# EAGLE board CombinedCircuit (EAGLE 9.7.0)

Size 450.85 x 189.67 mm. Coordinates in mm from the lower left corner, seen from the top.
Outline: 0,0 450.85,0 450.85,189.67 0,189.67 0,0
Copper layers (1*16): Top 0.035mm / dielectric 1.5mm / Bottom 0.035mm
Design rules "default": minimum track width 6mil, minimum drill 0.35mm, track to track 6mil, track to pad 6mil, pad to pad 6mil, via to via 6mil, smd to smd 6mil, copper to edge 40mil, drill to drill 6mil, minimum pad ring 10mil, minimum via ring 8mil, stop-mask expansion 4mil, vias tented up to drill 0mil, thermal gap 10mil

## Footprints (pad centres in the part's own frame; a part is rotated, then mirrored left to right if it is on the bottom)
BATTERY-GENERIC = drill 1.118 pad 3.15 octagon: + 2.54,0; - -2.54,0
LEDRD254W60D565H860B = drill 0.981 pad 1.581: 1 -1.27,0; 2 1.27,0
LEDRD254W60D565H860B_O = drill 0.981 pad 1.581: 1 -1.27,0; 2 1.27,0
LEDRD254W60D565H860B_G = drill 0.981 pad 1.581: 1 -1.27,0; 2 1.27,0
MQ-XX-SOCKET = drill 1.27: 1 -6.223,6.223; 2 -8.788,0; 3 -6.223,-6.223; 4 6.223,-6.223; 5 8.788,0; 6 6.223,6.223
DG01D = drill 1.118 pad 3.15 octagon: + 2.54,0; - -2.54,0
PIEZO = drill 1 pad 1.6: 1 -3.5,0; 2 3.5,0
28015 = drill 1.016 long: 1 -2.54,0; 2 0,0; 3 2.54,0
28027 = drill 1.016 long: 1 -2.54,0; 2 0,0; 3 2.54,0
RESAD1016W63L850D250B = drill 0.83 pad 1.43: 1 -5.08,0; 2 5.08,0
GL5528 = drill 0.8 pad 1.4: 1 -1.702,0; 2 1.702,0
HA-06-SM065 = drill 1 pad 1.676: 1 -2.54,-2.54; 2 0,2.54; 3 2.54,-2.54
ARDUINO-UNO-R3-SHIELD = drill 1.016 pad 1.88: 3.3V 24.13,-2.54; 5V 24.13,0; A0 24.13,12.7; A1 24.13,15.24; A2 24.13,17.78; A3 24.13,20.32; A4 24.13,22.86; A5 24.13,25.4; AREF -24.13,-13.97; D2 -24.13,20.32; D3 -24.13,17.78; D4 -24.13,15.24; D5 -24.13,12.7; D6 -24.13,10.16; D7 -24.13,7.62; D8 -24.13,3.81; D9 -24.13,1.27; D10 -24.13,-1.27; D11 -24.13,-3.81; D12 -24.13,-6.35; D13 -24.13,-8.89; GND@0 24.13,2.54; GND@1 24.13,5.08; GND@2 -24.13,-11.43; IOREF 24.13,-7.62; NC 24.13,-10.16; RES 24.13,-5.08; RX -24.13,25.4; SCL -24.13,-19.05; SDA -24.13,-16.51; TX -24.13,22.86; VIN 24.13,7.62
JHD-162A = drill 1.016 long: 1 -19.05,0; 2 -16.51,0; 3 -13.97,0; 4 -11.43,0; 5 -8.89,0; 6 -6.35,0; 7 -3.81,0; 8 -1.27,0; 9 1.27,0; 10 3.81,0; 11 6.35,0; 12 8.89,0; 13 11.43,0; 14 13.97,0; 15 16.51,0; 16 19.05,0
TO92 = drill 0.813 octagon: 1 -1.27,0; 2 0,1.905; 3 1.27,0
DIP762W53P254L1969H508Q16B = drill 0.743 pad 1.343: 1 -3.81,8.89; 2 -3.81,6.35; 3 -3.81,3.81; 4 -3.81,1.27; 5 -3.81,-1.27; 6 -3.81,-3.81; 7 -3.81,-6.35; 8 -3.81,-8.89; 9 3.81,-8.89; 10 3.81,-6.35; 11 3.81,-3.81; 12 3.81,-1.27; 13 3.81,1.27; 14 3.81,3.81; 15 3.81,6.35; 16 3.81,8.89

## Placement (x,y rotation side)
BAT1  9V  [BATTERY-GENERIC]  336.27,21.85 270 top
D1  RED  [LEDRD254W60D565H860B]  37.72,125.2 180 top
D2  RED  [LEDRD254W60D565H860B]  248.03,64.29 180 top
D3  ORANGE  [LEDRD254W60D565H860B_O]  253.11,64.29 180 top
D4  GREEN  [LEDRD254W60D565H860B_G]  258.19,64.29 180 top
GAS1  GAS-SENSORMQ-XX-SOCKET  [MQ-XX-SOCKET]  236.6,68.1 270 top
M1  MOTOR_DG01D  [DG01D]  403.26,114.91 180 top
M2  MOTOR_DG01D  [DG01D]  438.15,115.38 180 top
PIEZO1  PIEZO  [PIEZO]  31.09,108.78 90 top
PING1  DISTANCE-SENSOR-3PIN  [28015]  355.99,115.4 0 top
PING2  DISTANCE-SENSOR-3PIN  [28015]  299.25,115.4 0 top
PIR1  PIR-SENSOR_28027  [28027]  151.51,131.42 0 top
R1  220  [RESAD1016W63L850D250B]  148.93,84.38 270 top
R2  PHOTOCELL_GL5528  [GL5528]  215.01,61.75 0 top
R3  220  [RESAD1016W63L850D250B]  33.92,110.03 90 top
R4  220  [RESAD1016W63L850D250B]  36.45,117.83 90 top
R5  10k  [RESAD1016W63L850D250B]  213.74,51.59 90 top
R6  220  [RESAD1016W63L850D250B]  241.68,87.15 90 top
R7  220  [RESAD1016W63L850D250B]  246.76,51.59 90 top
R8  50  [RESAD1016W63L850D250B]  251.84,51.59 90 top
R9  220  [RESAD1016W63L850D250B]  256.92,51.59 90 top
RPOT1  250k  [HA-06-SM065]  110.83,58.98 0 top
U1  ARDUINO-UNO-R3-SHIELD  [ARDUINO-UNO-R3-SHIELD]  47.88,69.27 270 top
U2  LCD-16X2JHD-162A  [JHD-162A]  132.5,36.63 0 top
U3  TMP36GT9Z_TO92  [TO92]  198.62,50.42 0 top
U5  L293E  [DIP762W53P254L1969H508Q16B]  321.06,68.5 270 top

## Library data of the parts
BAT1 GAS1 M1 M2 PIEZO1 PING1 PING2 PIR1 R1-R9 RPOT1 U1-U3 U5 = Tinkercad
D1 D2 = Tinkercad; CATEGORY: Opto-Electronic; SUB-CATEGORY: LED; VALUE: LED_RED
D3 = Tinkercad; CATEGORY: Opto-Electronic; SUB-CATEGORY: LED; VALUE: LED_ORANGE
D4 = Tinkercad; CATEGORY: Opto-Electronic; SUB-CATEGORY: LED; VALUE: LED_GREEN

## Nets
BAT1+: BAT1.+ U5.8 U5.16
BAT1-: BAT1.- GAS1.2 M1.- M2.- PING1.1 PING1.2 PING2.1 PIR1.3 R3.1 R4.1 R5.1 R6.2 R7.1 R8.1 R9.1 RPOT1.3 U1.GND@0 U1.GND@1 U1.GND@2 U2.1 U2.5 U2.16 U3.1 U5.4 U5.5 U5.12 U5.13
D1_C: D1.2 R4.2
D2_C: D2.2 R7.2
D3_C: D3.2 R8.2
D4_C: D4.2 R9.2
M1_+: M1.+ U5.3
M2_+: M2.+ U5.6
PIEZO1_2: PIEZO1.2 R3.2
U1_5V: GAS1.4 GAS1.5 GAS1.6 PING2.2 PIR1.2 R1.1 R2.2 RPOT1.1 U1.5V U2.2 U3.3 U5.1
U1_A0: U1.A0 U5.2
U1_A1: U1.A1 U5.7
U1_A3: GAS1.1 GAS1.3 R6.1 U1.A3
U1_A4: R2.1 R5.2 U1.A4
U1_A5: U1.A5 U3.2
U1_D2: U1.D2 U2.14
U1_D3: U1.D3 U2.13
U1_D4: U1.D4 U2.12
U1_D5: U1.D5 U2.11
U1_D6: PIR1.1 U1.D6
U1_D8: D2.1 U1.D8
U1_D9: D3.1 U1.D9
U1_D10: D4.1 U1.D10
U1_D11: U1.D11 U2.6
U1_D12: U1.D12 U2.4
U1_D13: D1.1 PIEZO1.1 U1.D13
U1_RX: PING1.3 U1.RX
U1_TX: PING2.3 U1.TX
U2_LED+: R1.2 U2.15
U2_VO: RPOT1.2 U2.3

## Tracks (layer width: path | path; a pad name or v marks a point on that pad's centre or on a via)
BAT1+  (2 unrouted)
BAT1-  (26 unrouted)
D1_C  (1 unrouted)
D2_C  (1 unrouted)
D3_C  (1 unrouted)
D4_C  (1 unrouted)
M1_+  (1 unrouted)
M2_+  (1 unrouted)
PIEZO1_2  (1 unrouted)
U1_5V  (11 unrouted)
U1_A0  (1 unrouted)
U1_A1  (1 unrouted)
U1_A3  (3 unrouted)
U1_A4  (2 unrouted)
U1_A5  (1 unrouted)
U1_D2  (1 unrouted)
U1_D3  (1 unrouted)
U1_D4  (1 unrouted)
U1_D5  (1 unrouted)
U1_D6  (1 unrouted)
U1_D8  (1 unrouted)
U1_D9  (1 unrouted)
U1_D10  (1 unrouted)
U1_D11  (1 unrouted)
U1_D12  (1 unrouted)
U1_D13  (2 unrouted)
U1_RX  (1 unrouted)
U1_TX  (1 unrouted)
U2_LED+  (1 unrouted)
U2_VO  (1 unrouted)